# EAGLE board EMC03-Motion Control - PACKD2GILLS (EAGLE 7.4.0)
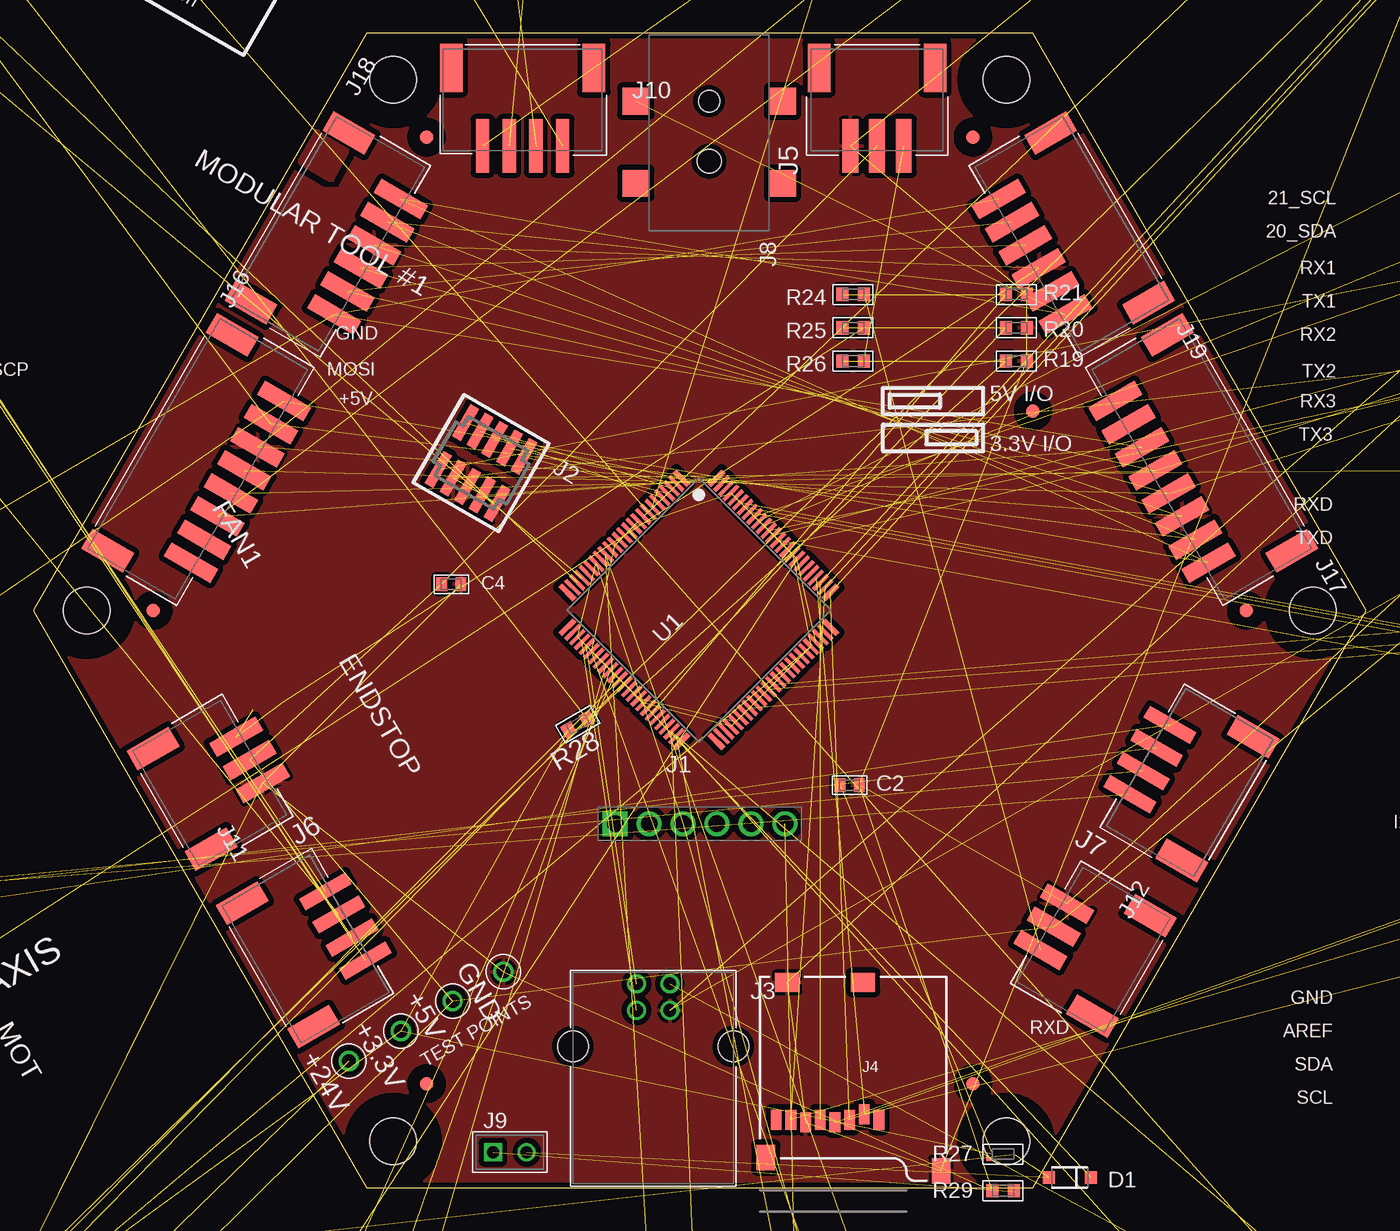
[diagram p0: board, top side]
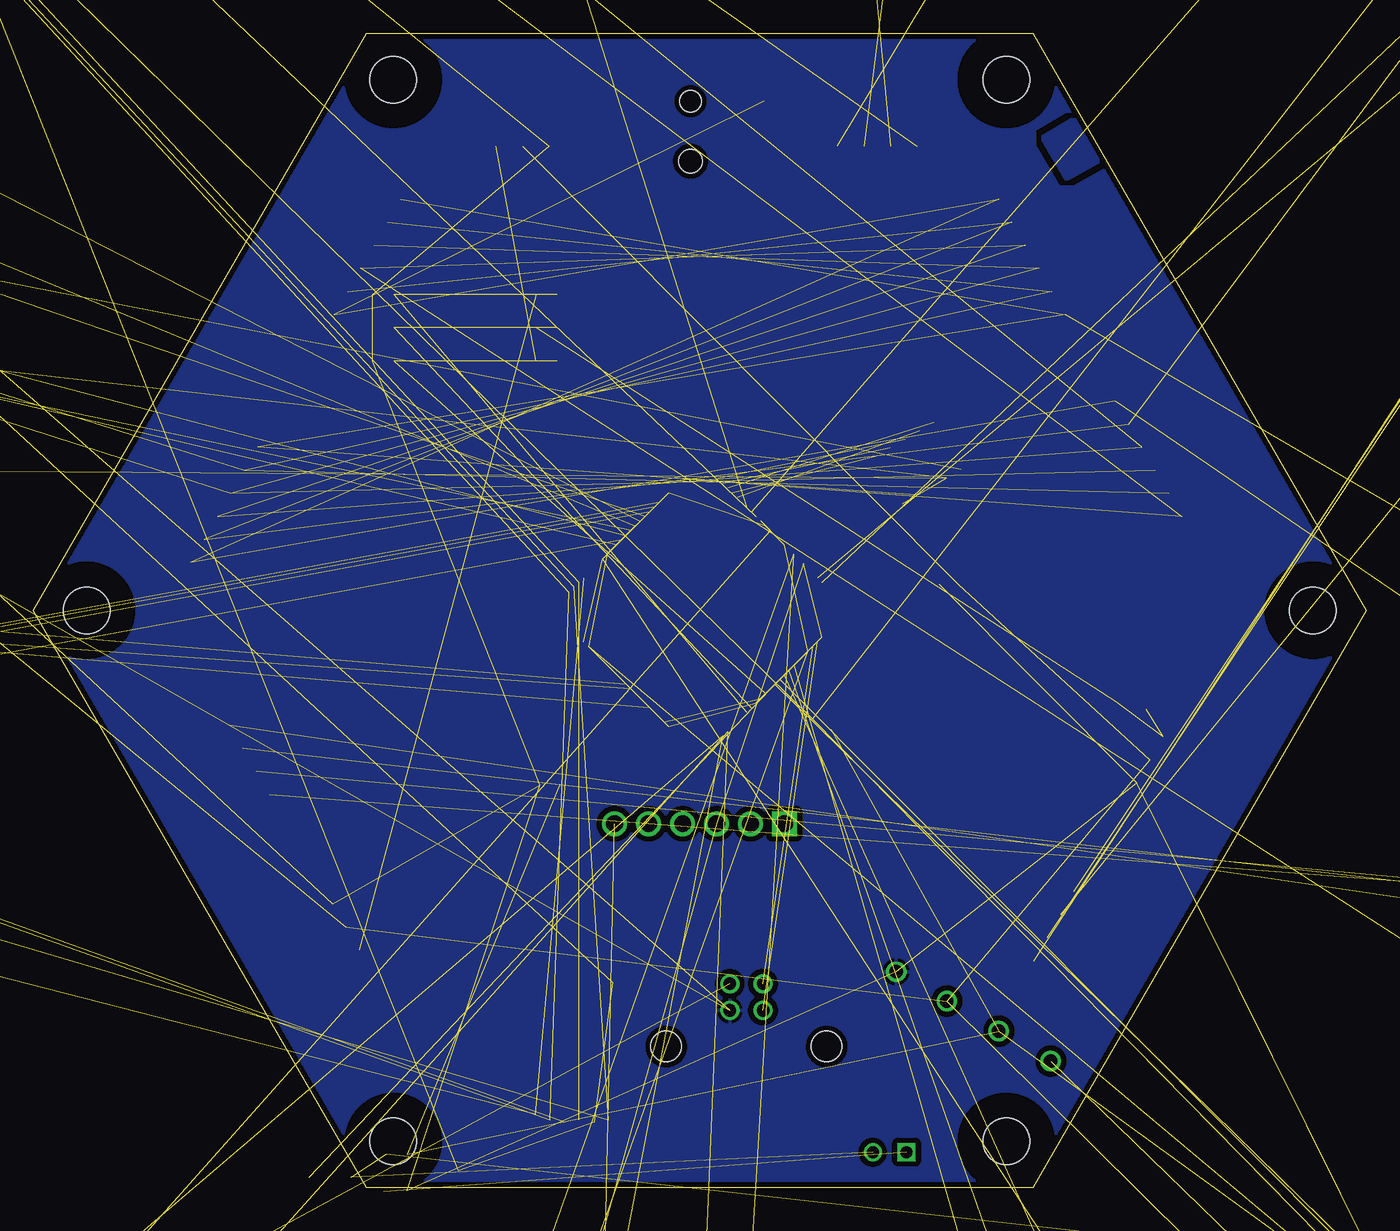
[diagram p1: board, bottom side, seen from below]

Size 100 x 86.6 mm. Coordinates in mm from the lower left corner, seen from the top.
Outline: 25,0 75,0 100,43.3 75,86.6 25,86.6 0,43.3 25,0
Copper layers (1*2*15*16): Top 0.035mm / dielectric 0.2mm / Route2 0.0175mm / dielectric 0.3mm / Route15 0.0175mm / dielectric 0.2mm / Bottom 0.035mm
Design rules "HQPCB_4layer_DRU_no_angle": minimum track width 6mil, minimum drill 12mil, track to track 8mil, track to pad 8mil, pad to pad 6mil, via to via 8mil, smd to smd 0mil, copper to edge 10mil, drill to drill 8mil, minimum pad ring 6mil, minimum via ring 4mil, stop-mask expansion 2mil, vias tented up to drill 100mil, thermal gap 10mil
Net classes: 0 default: width 0.152 mm, drill 0.305 mm, clearance 0.152 mm
Holes 3.5 mm at 4,43.3 27,3.46 73,3.46 96,43.3 27,83.14 73,83.14
tRestrict: area 92.8,40 to 99.2,46.5; area 0.8,40 to 7.2,46.5; area 69.8,0.2 to 76.2,6.7; area 23.8,79.9 to 30.2,86.4; area 69.8,79.9 to 76.2,86.4; area 23.8,0.2 to 30.2,6.7
bRestrict: area 0.8,40 to 7.2,46.5; area 69.8,79.9 to 76.2,86.4; area 92.8,40 to 99.2,46.5; area 23.8,0.2 to 30.2,6.7; area 69.8,0.2 to 76.2,6.7; area 23.8,79.9 to 30.2,86.4

## Footprints (pad centres in the part's own frame; a part is rotated, then mirrored left to right if it is on the bottom)
C0603 = smd 0.8 x 1: 1 -0.725,0; 2 0.725,0
PANASONIC_D = smd 3 x 1.4: + 2.4,0; - -2.4,0
C-RAD-6.3MM = drill 0.5 pad 0.75 square: NEG 0,1.25 | drill 0.5 pad 0.75: POS 0,-1.25
C-SMD-4MM = smd 3.4 x 0.9: NEG -2.1,0; POS 2.1,0
C-SMD-10MM = smd 1.32 x 4.225: NEG 0,-4.162; POS 0,4.162
SOD-123 = smd 0.9 x 0.95: A 1.575,0; C -1.575,0
DIO-SM2 = smd 1.85 x 1.8: NEG -2,0; POS 2,0
MICRO-SMP = smd 1.6 x 1.1: NEG -0.9,0 | smd 1.05 x 0.8: POS 1.04,0
F0603 = smd 1.1 x 1: 1 -0.8,0; 2 0.8,0
FIDUCIAL = smd 1 x 1: 1 0,0
CON-HDR-6POS-MALE = drill 1.25 square: 1 -6.35,0 | drill 1.25: 2 -3.8,0; 3 -1.26,0; 4 1.28,0; 5 3.85,0; 6 6.39,0
FTSH-105-01-XXX-DV-K = smd 0.737 x 2.794: 1 -2.54,-2.032; 2 -2.54,2.032; 3 -1.27,-2.032; 4 -1.27,2.032; 5 0,-2.032; 6 0,2.032; 7 1.27,-2.032; 8 1.27,2.032; 9 2.54,-2.032; 10 2.54,2.032
USB-B(THRU) = drill 0.95: 1 1.25,1; 2 -1.25,1; 3 -1.25,-1; 4 1.25,-1 | hole 2.3: -6.02,-3.71; 6.02,-3.71
MICRO-SD-SOCKET-PP = smd 0.8 x 1.5: 1 -8.94,10.7; 2 -7.84,10.3; 3 -6.74,10.7; 4 -5.64,10.9; 5 -4.54,10.7; 6 -3.44,10.9; 7 -2.34,10.7; 8 -1.24,10.7 | smd 1.8 x 1.4: CD1 -7.75,0.4; CD2 -2.05,0.4 | smd 1.4 x 1.9: GND1 -13.6,14.55; GND2 -0.45,13.55
CONN-JST-PH-2.0MM-3P-SMT-RA = smd 1.2 x 4: 1 2,0; 2 0,0; 3 -2,0 | smd 1.7 x 3.6: NC1 -4.35,5.85; NC2 4.35,5.85
PJ-694106106102 = smd 2 x 2: 2 0,-5.5; 3 6.15,-5.5; TAB1 6.15,5.5; TAB2 0,5.5 | hole 1.6: 0,0 | hole 1.8: 4.5,0
CON-HDR-2POS-MALE = drill 0.9 square: 1 -1.27,0 | drill 0.9: 2 1.27,0
CONN-JST-PH-2.0MM-4P-SMT-RA = smd 1 x 4: 1 3,0; 2 1,0; 3 -1,0; 4 -3,0 | smd 1.7 x 3.6: NC1 5.35,5.85; NC2 -5.35,5.85
CONN-JST-PH-2.0MM-5P-SMT-RA = smd 1.2 x 4: 1 4,0; 2 2,0; 3 0,0; 4 -2,0; 5 -4,0 | smd 1.7 x 3.6: NC1 6.35,5.85; NC2 -6.35,5.85
CONN-JST-PH-2.0MM-8P-SMT-RA = smd 1.2 x 4: 1 7,0; 2 5,0; 3 3,0; 4 1,0; 5 -1,0; 6 -3,0; 7 -5,0; 8 -7,0 | smd 1.7 x 3.6: NC1 9.35,5.85; NC2 -9.35,5.85
CONN-JST-PH-2.0MM-6P-SMT-RA = smd 1.2 x 4: 1 5,0; 2 3,0; 3 1,0; 4 -1,0; 5 -3,0; 6 -5,0 | smd 1.7 x 3.6: NC1 7.35,5.85; NC2 -7.35,5.85
L-SMD-12.5MM = smd 3.95 x 5.5: P$1 -5.1,0; P$2 5.1,0
LED0603 = smd 1.1 x 1: A -0.85,0; C 0.85,0
HC-49/U-S = smd 5.5 x 1.5: 1 -4.25,0; 2 4.25,0
R1206 = smd 1.2 x 1.8: 1 -1.2,0; 2 1.2,0
R0603 = smd 0.9 x 1: 1 -0.8,0; 2 0.8,0
MAGJACK(HR911105A) = drill 1.15: 1 4.44,-6.35; 2 3.18,-8.89; 3 1.9,-6.35; 4 0.64,-8.89; 5 -0.64,-6.35; 6 -1.9,-8.89; 7 -3.18,-6.35; 8 -4.44,-8.89 | drill 1.27: 9 6.625,4.9; 10 4.085,4.9; 11 -4.085,4.9; 12 -6.625,4.9 | drill 3.5: SHLD0 5.715,0; SHLD1 -5.715,0 | hole 1.7: -7.745,-3.05; 7.745,-3.05
SMS-001 = smd 1.092 x 2.007: 1 0,-4.496; 2 0,4.496
0603 = smd 1.1 x 1: 1 -0.85,0; 2 0.85,0
CON-TESTPOINT = drill 1.016: 1 0,0
LQFP-100 = smd 0.4 x 1.5: 1 -6.05,-7.9; 25 6.05,-7.9; 51 6.05,7.9; 75 -6.05,7.9 | smd 0.28 x 1.5: 2 -5.5,-7.9; 3 -5,-7.9; 4 -4.5,-7.9; 5 -4,-7.9; 6 -3.5,-7.9; 7 -3,-7.9; 8 -2.5,-7.9; 9 -2,-7.9; 10 -1.5,-7.9; 11 -1,-7.9; 12 -0.5,-7.9; 13 0,-7.9; 14 0.5,-7.9; 15 1,-7.9; 16 1.5,-7.9; 17 2,-7.9; 18 2.5,-7.9; 19 3,-7.9; 20 3.5,-7.9; 21 4,-7.9; 22 4.5,-7.9; 23 5,-7.9; 24 5.5,-7.9; 52 5.5,7.9; 53 5,7.9; 54 4.5,7.9; 55 4,7.9; 56 3.5,7.9; 57 3,7.9; 58 2.5,7.9; 59 2,7.9; 60 1.5,7.9; 61 1,7.9; 62 0.5,7.9; 63 0,7.9; 64 -0.5,7.9; 65 -1,7.9; 66 -1.5,7.9; 67 -2,7.9; 68 -2.5,7.9; 69 -3,7.9; 70 -3.5,7.9; 71 -4,7.9; 72 -4.5,7.9; 73 -5,7.9; 74 -5.5,7.9 | smd 1.5 x 0.4: 26 7.9,-6.05; 50 7.9,6.05; 76 -7.9,6.05; 100 -7.9,-6.05 | smd 1.5 x 0.28: 27 7.9,-5.5; 28 7.9,-5; 29 7.9,-4.5; 30 7.9,-4; 31 7.9,-3.5; 32 7.9,-3; 33 7.9,-2.5; 34 7.9,-2; 35 7.9,-1.5; 36 7.9,-1; 37 7.9,-0.5; 38 7.9,0; 39 7.9,0.5; 40 7.9,1; 41 7.9,1.5; 42 7.9,2; 43 7.9,2.5; 44 7.9,3; 45 7.9,3.5; 46 7.9,4; 47 7.9,4.5; 48 7.9,5; 49 7.9,5.5; 77 -7.9,5.5; 78 -7.9,5; 79 -7.9,4.5; 80 -7.9,4; 81 -7.9,3.5; 82 -7.9,3; 83 -7.9,2.5; 84 -7.9,2; 85 -7.9,1.5; 86 -7.9,1; 87 -7.9,0.5; 88 -7.9,0; 89 -7.9,-0.5; 90 -7.9,-1; 91 -7.9,-1.5; 92 -7.9,-2; 93 -7.9,-2.5; 94 -7.9,-3; 95 -7.9,-3.5; 96 -7.9,-4; 97 -7.9,-4.5; 98 -7.9,-5; 99 -7.9,-5.5
SOICN-8 = smd 2.2 x 0.6: 1 -2.6,1.905; 2 -2.6,0.635; 3 -2.6,-0.635; 4 -2.6,-1.905; 5 2.6,-1.905; 6 2.6,-0.635; 7 2.6,0.635; 8 2.6,1.905
QFN-24 = smd 0.7 x 0.28: 1 -1.89,1.25; 2 -1.89,0.75; 3 -1.89,0.25; 4 -1.89,-0.25; 5 -1.89,-0.75; 6 -1.89,-1.25; 13 1.89,-1.25; 14 1.89,-0.75; 15 1.89,-0.25; 16 1.89,0.25; 17 1.89,0.75; 18 1.89,1.25 | smd 0.28 x 0.7: 7 -1.25,-1.89; 8 -0.75,-1.89; 9 -0.25,-1.89; 10 0.25,-1.89; 11 0.75,-1.89; 12 1.25,-1.89; 19 1.25,1.89; 20 0.75,1.89; 21 0.25,1.89; 22 -0.25,1.89; 23 -0.75,1.89; 24 -1.25,1.89 | smd 2.5 x 2.5: PAD 0,0
SOT-25 = smd 0.38 x 0.4: 1 0.95,1.2; 2 0,1.2; 3 -0.95,1.2; 4 -0.95,-1.2; 5 0.95,-1.2
SC70 = smd 0.4 x 0.9: 1 0.65,1.1; 2 0,1.1; 3 -0.65,1.1; 4 -0.65,-1.1; 5 0.65,-1.1
QFN36-(5X6) = smd 0.45 x 0.3: 1 -2.3,2.25; 2 -2.3,1.75; 3 -2.3,1.25; 4 -2.3,0.75; 5 -2.3,0.25; 6 -2.3,-0.25; 7 -2.3,-0.75; 8 -2.3,-1.25; 9 -2.3,-1.75; 10 -2.3,-2.25; 19 2.3,-2.25; 20 2.3,-1.75; 21 2.3,-1.25; 22 2.3,-0.75; 23 2.3,-0.25; 24 2.3,0.25; 25 2.3,0.75; 26 2.3,1.25; 27 2.3,1.75; 28 2.3,2.25 | smd 0.3 x 0.45: 11 -1.75,-2.8; 12 -1.25,-2.8; 13 -0.75,-2.8; 14 -0.25,-2.8; 15 0.25,-2.8; 16 0.75,-2.8; 17 1.25,-2.8; 18 1.75,-2.8; 29 1.75,2.8; 30 1.25,2.8; 31 0.75,2.8; 32 0.25,2.8; 33 -0.25,2.8; 34 -0.75,2.8; 35 -1.25,2.8; 36 -1.75,2.8 | smd 2.6 x 3.1: PAD 0,0
SOT-23-5 = smd 0.7 x 1: 1 0.95,1.2; 2 0,1.2; 3 -0.95,1.2; 4 -0.95,-1.2; 5 0.95,-1.2
TO263-5 = smd 1.07 x 2.25: 1 -3.4,-8.13; 2 -1.7,-8.13; 3 0,-8.13; 4 1.7,-8.13; 5 3.4,-8.13 | smd 10.8 x 6.99: GND 0,3.495
SOT-89 = smd 1 x 2.1: 1 -1.5,-2; 2 0,-2; 3 1.5,-2

## Placement (x,y rotation side)
C1  12pF  [C0603]  -519.62,512.92 0 top  (outside the outline)
C2  0.1uF  [C0603]  61.24,30.19 0 top
C3  100uF  [PANASONIC_D]  114.25,52.89 270 top  (outside the outline)
C4  0.1uF  [C0603]  31.35,45.27 0 top
C5  0.1uF  [C0603]  129.9,-266.51 0 top  (outside the outline)
C6  10nF  [C0603]  129.9,-331.46 0 top  (outside the outline)
C7  0.1uF  [C0603]  194.86,-266.51 0 top  (outside the outline)
C8  10nF  [C0603]  194.86,-331.46 0 top  (outside the outline)
C9  0.1uF  [C0603]  259.81,-266.51 0 top  (outside the outline)
C10  10nF  [C0603]  259.81,-331.46 0 top  (outside the outline)
C11  12pF  [C0603]  584.57,-6.7 0 top  (outside the outline)
C12  12pF  [C0603]  649.52,-6.7 0 top  (outside the outline)
C13  0.1uF  [C0603]  584.57,58.25 0 top  (outside the outline)
C14  10uF  [C-RAD-6.3MM]  584.57,318.06 0 top  (outside the outline)
C15  100 nF  [C0603]  -129.9,-6.7 0 top  (outside the outline)
C16  470 nF  [C0603]  -389.71,58.25 0 top  (outside the outline)
C17  100 nF  [C0603]  -324.76,58.25 0 top  (outside the outline)
C18  0.1uF  [C0603]  649.52,58.25 0 top  (outside the outline)
C19  0.1uF  [C0603]  714.47,58.25 0 top  (outside the outline)
C20  1uF  [C-SMD-4MM]  389.71,58.25 0 top  (outside the outline)
C21  470pF  [C0603]  519.62,58.25 0 top  (outside the outline)
C22  10uF  [C-RAD-6.3MM]  649.52,318.06 0 top  (outside the outline)
C23  0.1uF  [C0603]  324.76,-6.7 0 top  (outside the outline)
C24  0.1uF  [C0603]  389.71,-6.7 0 top  (outside the outline)
C25  0.1uF  [C0603]  454.66,-6.7 0 top  (outside the outline)
C26  18pF  [C0603]  714.47,-6.7 0 top  (outside the outline)
C27  10nF  [C0603]  324.76,-331.46 0 top  (outside the outline)
C28  0.1uF  [C0603]  324.76,-266.51 0 top  (outside the outline)
C29  0.1uF  [C0603]  64.95,-331.46 0 top  (outside the outline)
C30  18pF  [C0603]  324.76,-71.65 0 top  (outside the outline)
C31  18pF  [C0603]  389.71,-71.65 0 top  (outside the outline)
C32  18pF  [C0603]  454.66,-71.65 0 top  (outside the outline)
C33  1uF  [C0603]  519.62,-71.65 0 top  (outside the outline)
C34  0.1uF  [C0603]  519.62,-6.7 0 top  (outside the outline)
C35  1uF  [C0603]  584.57,-71.65 0 top  (outside the outline)
C36  1uF  [C0603]  649.52,-71.65 0 top  (outside the outline)
C37  220uF  [C-SMD-10MM]  -64.95,-136.6 0 top  (outside the outline)
C38  470uF  [C-SMD-10MM]  -194.86,-266.51 0 top  (outside the outline)
C39  100 nF  [C0603]  194.86,253.11 0 top  (outside the outline)
C40  470 nF  [C0603]  -64.95,318.06 0 top  (outside the outline)
C41  100 nF  [C0603]  0,318.06 0 top  (outside the outline)
C42  100 nF  [C0603]  64.95,318.06 0 top  (outside the outline)
C43  470pF  [C0603]  -64.95,383.01 0 top  (outside the outline)
C44  470pF  [C0603]  0,383.01 0 top  (outside the outline)
C45  470pF  [C0603]  64.95,383.01 0 top  (outside the outline)
C46  470pF  [C0603]  129.9,383.01 0 top  (outside the outline)
C47  100nF  [C0603]  194.86,383.01 0 top  (outside the outline)
C48  100nF  [C0603]  -64.95,447.96 0 top  (outside the outline)
C49  22 nF  [C0603]  0,447.96 0 top  (outside the outline)
C50  0.33uF  [C0603]  194.86,318.06 0 top  (outside the outline)
C51  100 nF  [C0603]  129.9,318.06 0 top  (outside the outline)
C52  100 nF  [C0603]  -259.81,58.25 0 top  (outside the outline)
C53  470pF  [C0603]  -389.71,123.2 0 top  (outside the outline)
C54  470pF  [C0603]  -324.76,123.2 0 top  (outside the outline)
C55  470pF  [C0603]  -259.81,123.2 0 top  (outside the outline)
C56  470pF  [C0603]  -194.86,123.2 0 top  (outside the outline)
C57  100nF  [C0603]  -129.9,123.2 0 top  (outside the outline)
C58  100nF  [C0603]  -389.71,188.16 0 top  (outside the outline)
C59  22 nF  [C0603]  -324.76,188.16 0 top  (outside the outline)
C60  0.33uF  [C0603]  -129.9,58.25 0 top  (outside the outline)
C61  100 nF  [C0603]  -194.86,58.25 0 top  (outside the outline)
C62  100 nF  [C0603]  -129.9,318.06 0 top  (outside the outline)
C63  470 nF  [C0603]  -389.71,383.01 0 top  (outside the outline)
C64  100 nF  [C0603]  -324.76,383.01 0 top  (outside the outline)
C65  100 nF  [C0603]  -259.81,383.01 0 top  (outside the outline)
C66  470pF  [C0603]  -389.71,447.96 0 top  (outside the outline)
C67  470pF  [C0603]  -324.76,447.96 0 top  (outside the outline)
C68  470pF  [C0603]  -259.81,447.96 0 top  (outside the outline)
C69  470pF  [C0603]  -194.86,447.96 0 top  (outside the outline)
C70  100nF  [C0603]  -129.9,447.96 0 top  (outside the outline)
C71  100nF  [C0603]  -389.71,512.92 0 top  (outside the outline)
C72  22 nF  [C0603]  -324.76,512.92 0 top  (outside the outline)
C73  0.33uF  [C0603]  -129.9,383.01 0 top  (outside the outline)
C74  100 nF  [C0603]  -194.86,383.01 0 top  (outside the outline)
C75  12pF  [C0603]  -454.66,512.92 0 top  (outside the outline)
C76  0.47uF  [C0603]  -714.47,512.92 0 top  (outside the outline)
D1  1N4148  [SOD-123]  77.75,0.75 180 top
D2  SJPB-H6  [DIO-SM2]  -194.86,-201.56 0 top  (outside the outline)
D3  MSS1P6  [MICRO-SMP]  -64.95,253.11 0 top  (outside the outline)
D4  MSS1P6  [MICRO-SMP]  0,253.11 0 top  (outside the outline)
D5  MSS1P6  [MICRO-SMP]  64.95,253.11 0 top  (outside the outline)
D6  MSS1P6  [MICRO-SMP]  129.9,253.11 0 top  (outside the outline)
D7  MSS1P6  [MICRO-SMP]  -389.71,-6.7 0 top  (outside the outline)
D8  MSS1P6  [MICRO-SMP]  -324.76,-6.7 0 top  (outside the outline)
D9  MSS1P6  [MICRO-SMP]  -259.81,-6.7 0 top  (outside the outline)
D10  MSS1P6  [MICRO-SMP]  -194.86,-6.7 0 top  (outside the outline)
D11  MSS1P6  [MICRO-SMP]  -389.71,318.06 0 top  (outside the outline)
D12  MSS1P6  [MICRO-SMP]  -324.76,318.06 0 top  (outside the outline)
D13  MSS1P6  [MICRO-SMP]  -259.81,318.06 0 top  (outside the outline)
D14  MSS1P6  [MICRO-SMP]  -194.86,318.06 0 top  (outside the outline)
FB1  BLM18AG121SN1D  [F0603]  454.66,-136.6 0 top  (outside the outline)
FB2  BLM18AG121SN1D  [F0603]  324.76,-461.36 0 top  (outside the outline)
FID1  FIDUCIAL  [FIDUCIAL]  9,43.3 0 top
FID2  FIDUCIAL  [FIDUCIAL]  91,43.3 0 top
FID3  FIDUCIAL  [FIDUCIAL]  29.5,78.81 0 top
FID4  FIDUCIAL  [FIDUCIAL]  29.5,7.79 0 top
FID5  FIDUCIAL  [FIDUCIAL]  70.5,7.79 0 top
FID6  FIDUCIAL  [FIDUCIAL]  75,58.25 0 top
FID7  FIDUCIAL  [FIDUCIAL]  70.5,78.81 0 top
J1  UART0  [CON-HDR-6POS-MALE]  50,27.3 0 top
J2  FTSH-105-1-L-DV  [FTSH-105-01-XXX-DV-K]  33.6,54.36 330 top
J3  USB-B  [USB-B(THRU)]  46.5,14.3 0 top
J4  MicroSD  [MICRO-SD-SOCKET-PP]  54.5,15.8 180 top
J5  S3B-PH-SM4  [CONN-JST-PH-2.0MM-3P-SMT-RA]  63.3,78.15 0 top
J6  S3B-PH-SM4  [CONN-JST-PH-2.0MM-3P-SMT-RA]  16.22,32.08 120 top
J7  S3B-PH-SM4  [CONN-JST-PH-2.0MM-3P-SMT-RA]  76.56,19.56 240 top
J8  694106106102  [PJ-694106106102]  50.7,81.5 270 top
J9  S2B-PH-SM4  [CON-HDR-2POS-MALE]  35.75,2.65 0 top
J10  S4B-PH-SM4  [CONN-JST-PH-2.0MM-4P-SMT-RA]  36.7,78.15 0 top
J11  S4B-PH-SM4  [CONN-JST-PH-2.0MM-4P-SMT-RA]  23.41,19.62 120 top
J12  S4B-PH-SM4  [CONN-JST-PH-2.0MM-4P-SMT-RA]  83.78,32.11 240 top
J13  S5B-PH-SM4  [CONN-JST-PH-2.0MM-5P-SMT-RA]  27.1,101.6 0 top  (outside the outline)
J14  S5B-PH-SM4  [CONN-JST-PH-2.0MM-5P-SMT-RA]  51,100.6 0 top  (outside the outline)
J15  S5B-PH-SM4  [CONN-JST-PH-2.0MM-5P-SMT-RA]  70.7,96.4 0 top  (outside the outline)
J16  S8B-PH-SM4  [CONN-JST-PH-2.0MM-8P-SMT-RA]  15.32,52.95 60 top
J17  S8B-PH-SM4  [CONN-JST-PH-2.0MM-8P-SMT-RA]  84.68,52.95 300 top
J18  S6B-PH-SM4  [CONN-JST-PH-2.0MM-6P-SMT-RA]  25.07,69.83 60 top
J19  S6B-PH-SM4  [CONN-JST-PH-2.0MM-6P-SMT-RA]  74.93,69.83 300 top
L1  100uH  [L-SMD-12.5MM]  -194.86,-136.6 0 top  (outside the outline)
LED1  GREEN  [LED0603]  194.86,-396.41 0 top  (outside the outline)
LED2  GREEN  [LED0603]  259.81,-396.41 0 top  (outside the outline)
LED3  GREEN  [LED0603]  324.76,-396.41 0 top  (outside the outline)
LED4  GREEN  [LED0603]  64.95,-461.36 0 top  (outside the outline)
LED5  RED  [LED0603]  194.86,-461.36 0 top  (outside the outline)
LED6  RED  [LED0603]  -324.76,-71.65 0 top  (outside the outline)
LED7  RED  [LED0603]  -194.86,-331.46 0 top  (outside the outline)
LOGO1  LOGO-FIREPICKLARGE  [LOGO-FIREPICK]  120.12,-7.06 0 bottom  (outside the outline)
LOGO2  LOGO-OSHWMEDIUM  [LOGO-OSHW-MEDIUM]  127.25,55.5 0 bottom  (outside the outline)
LOGO3  LOGO-CC-BY-SALARGE  [LOGO-CC-BY-SA]  129.25,84.75 330 bottom  (outside the outline)
LOGO4  LOGO-FIREPICKLARGE  [LOGO-FIREPICK]  -24.76,44.19 0 top  (outside the outline)
LOGO5  LOGO-OSHWMEDIUM  [LOGO-OSHW-MEDIUM]  129.9,58.65 0 top  (outside the outline)
LOGO6  LOGO-CC-BY-SALARGE  [LOGO-CC-BY-SA]  114.55,75.68 30 top  (outside the outline)
LOGO7  LOGO-CC-BY-SALARGE  [LOGO-CC-BY-SA]  64.95,-71.65 0 top  (outside the outline)
LOGO8  LOGO-CC-BY-SALARGE  [LOGO-CC-BY-SA]  64.95,-136.6 0 top  (outside the outline)
LOGO9  LOGO-CC-BY-SALARGE  [LOGO-CC-BY-SA]  -324.76,-266.51 0 top  (outside the outline)
LOGO10  LOGO-FIREPICKLARGE  [LOGO-FIREPICK]  -519.62,253.11 0 top  (outside the outline)
LOGO11  LOGO-FIREPICKLARGE  [LOGO-FIREPICK]  -519.62,318.06 0 top  (outside the outline)
LOGO12  LOGO-FIREPICKLARGE  [LOGO-FIREPICK]  -519.62,383.01 0 top  (outside the outline)
Q1  12MHz  [HC-49/U-S]  -454.66,447.96 0 top  (outside the outline)
Q2  25MHz  [HC-49/U-S]  454.66,58.25 0 top  (outside the outline)
R1  0.22  [R1206]  -259.81,188.16 0 top  (outside the outline)
R2  0.22  [R1206]  -194.86,188.16 0 top  (outside the outline)
R3  1M  [R0603]  -519.62,447.96 0 top  (outside the outline)
R4  10k  [R0603]  259.81,-201.56 0 top  (outside the outline)
R5  10k  [R0603]  324.76,-201.56 0 top  (outside the outline)
R6  470R  [R0603]  -324.76,-331.46 0 top  (outside the outline)
R7  470R  [R0603]  -64.95,-201.56 0 top  (outside the outline)
R8  470R  [R0603]  -64.95,-266.51 0 top  (outside the outline)
R9  470R  [R0603]  -64.95,-331.46 0 top  (outside the outline)
R10  22R  [R0603]  324.76,188.16 0 top  (outside the outline)
R11  22R  [R0603]  389.71,188.16 0 top  (outside the outline)
R12  22R  [R0603]  454.66,188.16 0 top  (outside the outline)
R13  1M  [R0603]  519.62,188.16 0 top  (outside the outline)
R14  12.1K  [R0603]  714.47,318.06 0 top  (outside the outline)
R15  22R  [R0603]  584.57,188.16 0 top  (outside the outline)
R16  1.5K  [R0603]  649.52,188.16 0 top  (outside the outline)
R17  10K  [R0603]  714.47,188.16 0 top  (outside the outline)
R18  10k  [R0603]  194.86,-201.56 0 top  (outside the outline)
R19  20K  [R0603]  73.75,62 180 top
R20  20K  [R0603]  73.75,64.5 180 top
R21  20K  [R0603]  73.75,67 180 top
R22  49R9  [R0603]  324.76,253.11 0 top  (outside the outline)
R23  10K  [R0603]  324.76,123.2 0 top  (outside the outline)
R24  10K  [R0603]  61.5,67 0 top
R25  10K  [R0603]  61.5,64.5 0 top
R26  10K  [R0603]  61.5,62 0 top
R27  100K  [R0603]  72.75,2.5 180 top
R28  10K  [R0603]  40.85,34.76 210 top
R29  4.7K  [R0603]  72.75,-0.25 0 top
R30  49R9  [R0603]  389.71,253.11 0 top  (outside the outline)
R31  49R9  [R0603]  454.66,253.11 0 top  (outside the outline)
R32  49R9  [R0603]  519.62,253.11 0 top  (outside the outline)
R33  330R  [R0603]  584.57,253.11 0 top  (outside the outline)
R34  330R  [R0603]  649.52,253.11 0 top  (outside the outline)
R35  10K  [R0603]  389.71,123.2 0 top  (outside the outline)
R36  10k  [R0603]  454.66,123.2 0 top  (outside the outline)
R37  10K  [R0603]  519.62,123.2 0 top  (outside the outline)
R38  1K  [R0603]  584.57,123.2 0 top  (outside the outline)
R39  1K  [R0603]  649.52,123.2 0 top  (outside the outline)
R40  100R  [R0603]  714.47,253.11 0 top  (outside the outline)
R41  470R  [R0603]  -64.95,-6.7 0 top  (outside the outline)
R42  1.2K  [R0603]  -324.76,-136.6 0 top  (outside the outline)
R43  10K  [R0603]  -324.76,-201.56 0 top  (outside the outline)
R44  0.22  [R1206]  64.95,447.96 0 top  (outside the outline)
R45  0.22  [R1206]  129.9,447.96 0 top  (outside the outline)
R46  0.22  [R1206]  -194.86,512.92 0 top  (outside the outline)
R47  0.22  [R1206]  -259.81,512.92 0 top  (outside the outline)
RJ1  HR911105A  [MAGJACK(HR911105A)]  389.71,318.06 0 top  (outside the outline)
S1  SWS001  [SMS-001]  129.9,-201.56 0 top  (outside the outline)
S2  147873-2  [0603]  64.95,-396.41 0 top  (outside the outline)
S3  147873-2  [0603]  129.9,-396.41 0 top  (outside the outline)
TP1  +3.3V  [CON-TESTPOINT]  27.56,11.74 30 top
TP2  +5V  [CON-TESTPOINT]  31.46,13.99 30 top
TP3  +24V  [CON-TESTPOINT]  23.67,9.49 30 top
TP4  GND  [CON-TESTPOINT]  35.27,16.19 30 top
U1  LPC1768  [LQFP-100]  49.94,43.35 225 top
U2  SP3485  [SOICN-8]  324.76,58.25 0 top  (outside the outline)
U3  LAN8720A  [QFN-24]  714.47,-71.65 0 top  (outside the outline)
U4  74LVC1G04W5-7  [SOT-25]  389.71,-136.6 0 top  (outside the outline)
U5  74AHCT  [SC70]  0,-6.7 0 top  (outside the outline)
U6  TMC2130-LA  [QFN36-(5X6)]  194.86,188.16 0 top  (outside the outline)
U7  TMC2130-LA  [QFN36-(5X6)]  -129.9,253.11 0 top  (outside the outline)
U8  TMC2130-LA  [QFN36-(5X6)]  194.86,512.92 0 top  (outside the outline)
U$25  TIN-WHISKERSTSTOP  [TIN-WHISKERS-TSTOP]  31.69,-20.74 0 top  (outside the outline)
VR1  TC1015-3.3VCT713  [SOT-23-5]  324.76,-136.6 0 top  (outside the outline)
VR2  SI-8050JD  [TO263-5]  -64.95,-71.65 0 top  (outside the outline)
VR3  KA78L05AMTF  [SOT-89]  -584.57,-396.41 0 top  (outside the outline)
VR4  KA78L05AMTF  [SOT-89]  -714.47,-396.41 0 top  (outside the outline)
VR5  KA78L05AMTF  [SOT-89]  -649.52,-396.41 0 top  (outside the outline)

## Library data of the parts
C1 C11 C12 C75 = TinWhiskers; PARTNO: GRM1885C1H120FA01J
C2 C4 C15 C17 C39 C41 C42 C47 C48 C51 C52 C57 C58 C61 C62 C64 C65 C70 C71 C74 = TinWhiskers; PARTNO: UMK107B7104KA-T
C3 = rcl; PARTNO: EMVA500ADA101MHA0G
C5 C7 C9 C13 C18 C19 C23-C25 C28 C29 C34 = TinWhiskers; PARTNO: GMK107BJ104KAHT
C6 C8 C10 C27 = TinWhiskers; PARTNO: GRM188R71H103KA01D
C14 C22 = TinWhiskers; PARTNO: EMVH350ADA100MF60G
C16 C40 C63 = TinWhiskers; PARTNO: UMK107B7474KA-TR
C20 = TinWhiskers; PARTNO: EMVE500ADA1R0MD55G
C21 C43-C46 C53-C56 C66-C69 = TinWhiskers; PARTNO: GRM188R72A471KA01D
C26 C30-C32 = TinWhiskers; PARTNO: GCM1885C1H180JA16D
C33 C35 C36 = TinWhiskers; PARTNO: UMK107AB7105KA-T
C37 = TinWhiskers; PARTNO: EMVY500ADA221MJA0G
C38 = TinWhiskers; PARTNO: EMVA250ADA471MJA0G
C49 C59 C72 = TinWhiskers; PARTNO: GRM188R71H223KA01D
C50 C60 C73 = TinWhiskers; PARTNO: C1608X7R1V334M080AB
C76 = TinWhiskers; PARTNO: LMK107B7474KA-T
D1 = SparkFun-DiscreteSemi; PARTNO: 1N4148W-7-F
D2 = TinWhiskers; PARTNO: SJPB-H6
D3-D14 = TinWhiskers; PARTNO: MSS1P6
FB1 FB2 = TinWhiskers; PARTNO: BLM18AG121SN1D
FID1-FID7 LOGO1 LOGO2 LOGO4 LOGO5 LOGO10-LOGO12 = FirePick; BOM: EXCLUDE
J1 = TinWhiskers; PARTNO: 67996-206HLF
J2 = TinWhiskers; PARTNO: FTSH-105-01-L-DV
J3 = TinWhiskers; PARTNO: 61729-1011BLF
J4 = TinWhiskers; PARTNO: 47334-0001
J5-J7 = TinWhiskers; PARTNO: S3B-PH-SM4-TB(LF)(SN)
J8 = TinWhiskers; PARTNO: 694106106102
J9 = TinWhiskers; PARTNO: S2B-PH-SM4-TB(LF)(SN)
J10-J12 = TinWhiskers; PARTNO: S4B-PH-SM4-TB(LF)(SN)
J13-J15 = TinWhiskers; PARTNO: S5B-PH-SM4-TB(LF)(SN)
J16 J17 = TinWhiskers; PARTNO: S8B-PH-SM4-TB(LF)(SN)
J18 J19 = TinWhiskers; PARTNO: S6B-PH-SM4-TB(LF)(SN)
L1 = TinWhiskers; PARTNO: DR125-101-R
LED1-LED4 = TinWhiskers; PARTNO: SML-D12M8WT86
LED5-LED7 = TinWhiskers; PARTNO: SML-D12U8WT86
LOGO3 LOGO6-LOGO9 = FirePick; BOM: EXCLUDE; DNP: T
Q1 = TinWhiskers; PARTNO: HCM4912000000ABJT
Q2 = TinWhiskers; PARTNO: HCM4925000000MABJ
R1 R2 R44-R47 = TinWhiskers; PARTNO: RL1206FR-7W0R22L
R3 R13 = TinWhiskers; PARTNO: RC0603FR-071ML
R4 R5 R17 R18 R23-R26 R28 R35-R37 R43 = TinWhiskers; PARTNO: RC0603FR-0710KL
R6-R9 R41 = TinWhiskers; PARTNO: RC0603FR-07470RL
R10-R12 R15 = TinWhiskers; PARTNO: RC0603JR-0722RL
R14 = TinWhiskers; PARTNO: RC0603FR-0712K1L
R16 = TinWhiskers; PARTNO: RC0603FR-071K5L
R19-R21 = TinWhiskers; PARTNO: RC0603FR-0722KL
R22 R30-R32 = TinWhiskers; PARTNO: RC0603FR-0749R9L
R27 = TinWhiskers; PARTNO: RC0603FR-07100KL
R29 = TinWhiskers; PARTNO: RC0603FR-074K7L
R33 R34 = TinWhiskers; PARTNO: RC0603FR-07330RL
R38 R39 = TinWhiskers; PARTNO: RC0603FR-071KL
R40 = TinWhiskers; PARTNO: RC0603FR-07100RL
R42 = TinWhiskers; PARTNO: RC0603FR-071K2L
RJ1 = TinWhiskers; PARTNO: HR911105A
S1 = smd-special; PARTNO: CHS-01TA
S2 S3 = TinWhiskers; PARTNO: 147873-2
TP1-TP4 = FirePick; DNP: T; PARTNO: N/A
U1 = TinWhiskers; PARTNO: LPC1768
U2 = TinWhiskers; PARTNO: SP3485
U3 = TinWhiskers; PARTNO: LAN8720A
U4 = TinWhiskers; PARTNO: 74LVC1G04
U5 = TinWhiskers; PARTNO: CAHCT1G126QDCKRG4
U6-U8 = TinWhiskers; PARTNO: TMC2130-LA
U$25 = !tin-whiskers; PARTNO: N/A
VR1 = TinWhiskers; PARTNO: TC1015-3.3VCT713
VR2 = TinWhiskers; PARTNO: SI-8050JD
VR3-VR5 = TinWhiskers; PARTNO: KA78L05AMTF

## Nets
1A_1: C45.1 D5.NEG J10.3 U6.32
1A_2: C68.1 D13.NEG J11.3 U7.32
1A_3: C55.1 D9.NEG J12.3 U8.32
1B_1: C46.1 D6.NEG J10.4 U6.34
1B_2: C69.1 D14.NEG J11.4 U7.34
1B_3: C56.1 D10.NEG J12.4 U8.34
2A_1: C44.1 D4.NEG J10.2 U6.13
2A_2: C67.1 D12.NEG J11.2 U7.13
2A_3: C54.1 D8.NEG J12.2 U8.13
2B_1: C43.1 D3.NEG J10.1 U6.15
2B_2: C66.1 D11.NEG J11.1 U7.15
2B_3: C53.1 D7.NEG J12.1 U8.15
!ENABLE: J16.2 J17.2 J18.2 J19.2 R28.1 U5.4 U6.22 U7.22 U8.22
!ENABLE_BUF: U1.38 U5.2
+3V3: C2.1 C5.2 C6.2 C7.2 C8.2 C9.2 C10.2 C13.2 C22.POS C23.2 C33.2 C34.2 C36.2 FB1.1 FB2.2 J1.3 J2.1 J4.4 R4.2 R5.2 R16.2 R17.2 R18.2 R27.2 R28.2 R35.1 R36.1 R37.1 R38.2 R41.2 TP1.1 U1.19 U1.28 U1.42 U1.54 U1.71 U1.84 U1.96 U2.8 U3.9 U4.5 U5.5 VR1.5
+5V [power]: C3.+ C4.1 C38.POS J5.2 J6.2 J7.2 J13.1 J14.1 J15.1 J16.6 J17.6 J18.6 J19.6 L1.P$2 R42.2 TP2.1 VR2.4
+24V: C15.2 C16.2 C17.1 C37.POS C39.2 C40.2 C41.1 C42.1 C50.2 C52.1 C60.2 C62.2 C63.2 C64.1 C65.1 C73.2 J8.2 J16.1 J17.1 J18.1 J19.1 R43.2 TP3.1 U6.16 U6.30 U6.31 U7.16 U7.30 U7.31 U8.16 U8.30 U8.31 VR2.1 VR3.1 VR4.1 VR5.1
A: J16.4 J17.4 J18.4 J19.4 R39.2 R40.1 U2.6
B: J16.5 J17.5 J18.5 J19.5 R38.1 R40.2 U2.7
BRA: C48.1 D3.POS D4.POS R44.2 U6.33
BRA2: C71.1 D11.POS D12.POS R46.2 U7.33
BRA3: C58.1 D7.POS D8.POS R1.2 U8.33
BRB: C47.1 D5.POS D6.POS R45.2 U6.14
BRB2: C70.1 D13.POS D14.POS R47.2 U7.14
BRB3: C57.1 D9.POS D10.POS R2.2 U8.14
CLK: U6.1 U7.1 U8.1
CPI: C49.2 U6.28
CPI1: C59.2 U8.28
CPI2: C72.2 U7.28
CPO: C49.1 U6.27
CPO1: C59.1 U8.27
CPO2: C72.1 U7.27
CRSPIN: R12.2 U3.11
DFU: R5.1 S3.2 U1.49
DI: U1.62 U2.4
DPWR: C27.2 C28.2 FB2.1 U1.10 U1.12
DTR: C29.1 J1.6
DTR1: U1.58 U2.2 U2.3
EE_D+: J16.7
EE_D-: J16.8
ENCX_A: J13.2
ENCX_B: J13.3
ENCY_B: J14.3
ENCZ_A: J15.2
ENCZ_B: J15.3
ENXY_A: J14.2
ESTOP: D1.C U1.39
ESTOP_OE: D1.A J9.2 R27.1 U5.1
ETH_CRS_DV: R12.1 U1.92
ETH_MDC: U1.87 U3.13
ETH_MDIO: R16.1 U1.86 U3.12
ETH_REF_CLK: R15.1 U1.88
ETH_RX_ER: R17.1 U1.89 U3.10
ETH_RXD0: R10.1 U1.91
ETH_RXD1: R11.1 U1.90
ETH_TX_EN: U1.93 U3.16
ETH_TXD0: U1.95 U3.17
ETH_TXD1: U1.94 U3.18
GND [power]: C1.1 C2.2 C3.- C4.2 C5.1 C6.1 C7.1 C8.1 C9.1 C10.1 C11.1 C12.1 C13.1 C14.NEG C16.1 C17.2 C18.1 C19.1 C20.NEG C21.1 C22.NEG C23.1 C24.1 C25.1 C26.1 C27.1 C28.1 C30.1 C31.1 C32.1 C33.1 C34.1 C35.1 C36.1 C37.NEG C38.NEG C40.1 C41.2 C42.2 C43.2 C44.2 C45.2 C46.2 C47.2 C48.2 C50.1 C51.1 C52.2 C53.2 C54.2 C55.2 C56.2 C57.2 C58.2 C60.1 C61.1 C63.1 C64.2 C65.2 C66.2 C67.2 C68.2 C69.2 C70.2 C71.2 C73.1 C74.1 C75.1 C76.1 D2.NEG J2.3 J2.5 J2.9 J3.4 J4.6 J4.CD2 J4.GND1 J5.3 J6.3 J7.3 J13.5 J14.5 J15.5 J16.3 J17.3 J18.3 J19.3 LED1.C LED2.C LED3.C LED4.C LED5.C LED6.C LED7.C R1.1 R2.1 R14.1 R19.1 R20.1 R21.1 R23.1 R29.1 R33.2 R34.2 R39.1 R44.1 R45.1 R46.1 R47.1 RJ1.SHLD0 RJ1.SHLD1 S1.1 S2.1 S3.1 TP4.1 U1.11 U1.15 U1.31 U1.41 U1.55 U1.72 U1.83 U1.97 U2.5 U3.PAD U4.3 U5.3 U6.12 U6.18 U6.24 U6.35 U6.36 U6.PAD U7.12 U7.18 U7.24 U7.35 U7.36 U7.PAD U8.12 U8.18 U8.24 U8.35 U8.36 U8.PAD VR2.3 VR2.GND VR3.2 VR4.2 VR5.2
ISP_COM: R4.1 S2.2 U1.48
LED1/REGOFF: RJ1.9 U3.3
LED2/NINTSEL: R23.2 RJ1.12 U3.2
MISO: J4.7 R36.2 U1.77 U6.5 U7.5 U8.5
MOSI: J4.3 R35.2 U1.76 U6.4 U7.4 U8.4
N$3: R15.2 U4.4
N$4: C76.2 VR2.5
N$5: J9.1 R29.2
N$6: C14.POS C18.2 C19.2 C24.2 C25.2 FB1.2 R22.2 R30.2 R31.2 R32.2 RJ1.4 RJ1.5 U3.1 U3.19
N$7: R33.1 RJ1.11
N$8: R34.1 RJ1.10
N$9: LED5.A R41.1
N$10: LED7.A R42.1
N$12: LED6.A R43.1
N$14: D2.POS L1.P$1 VR2.2
N$17: C35.2 VR1.2
N$20: LED1.A R6.1
N$23: C20.POS C21.2 U3.6
N$24: LED2.A R7.1
N$25: LED4.A R9.1
N$26: LED3.A R8.1
NINT/REFCLK0: U3.14 U4.2
NRST: U3.15
RBIAS: R14.2 U3.24
RD+: C31.2 R31.1 RJ1.3 U3.23
RD-: C32.2 R32.1 RJ1.6 U3.22
RESET: C29.2 R18.1 S1.2 U1.17
RESET_N: J2.10 U1.4
RO: U1.63 U2.1
RTCK: J2.7 U1.100
RXD0PIN: R10.2 U3.8
RXD1PIN: R11.2 U3.7
SCK: J4.5 U1.78 U6.3 U7.3 U8.3
SD_CS: J4.2 R37.2 U1.79
SPI_!CS1: U1.9 U6.2
SPI_!CS2: U1.8 U7.2
SPI_!CS3: U1.7 U8.2
STAT_LED4: R6.2 U1.37
STAT_LED5: R7.2 U1.36
STAT_LED6: R8.2 U1.35
STAT_LED7: R9.2 U1.34
SWDCLK: J2.4 U1.5
SWDIO: J2.2 U1.3
SWO: J2.6 U1.1
TD+: C26.2 R22.1 RJ1.1 U3.21
TD-: C30.2 R30.1 RJ1.2 U3.20
TDI: J2.8 U1.2
ULC_D+: J17.7
ULC_D-: J17.8
USB_D+: J3.3 U1.29
USB_D-: J3.2 U1.30
VCC1: C51.2 U6.8 U6.26 VR3.3
VCC2: C74.2 U7.8 U7.26 VR4.3
VCC3: C61.2 U8.8 U8.26 VR5.3
VCP: C39.1 U6.29
VCP1: C15.1 U8.29
VCP2: C62.1 U7.29
VR_IN: J3.1 VR1.1 VR1.3
X_DIR: U6.7
X_INDEX: J13.4
X_MIN: R19.2 R26.1 U1.40
X_STEP: U6.6
X_STOP: J5.1 R26.2
XTAL1: C1.2 Q1.1 R3.1 U1.22
XTAL2: C75.2 Q1.2 R3.2 U1.23
XTAL3: C11.2 Q2.1 R13.1 U3.5
XTAL4: C12.2 Q2.2 R13.2 U3.4
Y_DIR: U7.7
Y_INDEX: J14.4
Y_MIN: R20.2 R25.1 U1.43
Y_STEP: U7.6
Y_STOP: J6.1 R25.2
Z_DIR: U8.7
Z_INDEX: J15.4
Z_MIN: R21.2 R24.1 U1.44
Z_STEP: U8.6
Z_STOP: J7.1 R24.2

## Tracks (layer width: path | path; a pad name or v marks a point on that pad's centre or on a via)
1A_1  (3 unrouted)
1A_2  (3 unrouted)
1A_3  (3 unrouted)
1B_1  (3 unrouted)
1B_2  (3 unrouted)
1B_3  (3 unrouted)
2A_1  (3 unrouted)
2A_2  (3 unrouted)
2A_3  (3 unrouted)
2B_1  (3 unrouted)
2B_2  (3 unrouted)
2B_3  (3 unrouted)
12V
  pour Top (no thermals): 115.55,96.58 119.45,89.88 122.55,91.58 118.65,98.38
  pour Bottom (no thermals): 119.55,96.88 116.35,95.08 118.25,91.98 121.25,93.68
  pour Bottom (no thermals): 128.95,80.58 125.75,78.78 127.65,75.68 130.75,77.48
  pour Bottom (isolate 0.406, no thermals): 19.25,77.48 21.05,80.68 24.25,78.78 22.45,75.68
  pour Bottom (isolate 0.406, no thermals): 28.65,93.68 30.45,96.98 33.65,95.08 31.75,91.98
  pour Top (no thermals): 128.95,80.78 125.75,78.88 127.65,75.78 130.65,77.58
  pour Top (no thermals): 30.75,97.48 28.45,93.68 31.65,91.88 33.85,95.48
  pour Top (no thermals): 21.25,80.88 19.25,77.38 22.35,75.58 24.25,79.08
!ENABLE  (8 unrouted)
!ENABLE_BUF  (1 unrouted)
+3V3  (42 unrouted)
+5V  (16 unrouted)
+24V  (35 unrouted)
A  (6 unrouted)
B  (6 unrouted)
BRA  (4 unrouted)
BRA2  (4 unrouted)
BRA3  (4 unrouted)
BRB  (4 unrouted)
BRB2  (4 unrouted)
BRB3  (4 unrouted)
CLK  (2 unrouted)
CPI  (1 unrouted)
CPI1  (1 unrouted)
CPI2  (1 unrouted)
CPO  (1 unrouted)
CPO1  (1 unrouted)
CPO2  (1 unrouted)
CRSPIN  (1 unrouted)
DFU  (2 unrouted)
DI  (1 unrouted)
DPWR  (4 unrouted)
DTR  (1 unrouted)
DTR1  (2 unrouted)
ESTOP  (1 unrouted)
ESTOP_OE  (3 unrouted)
ETH_CRS_DV  (1 unrouted)
ETH_MDC  (1 unrouted)
ETH_MDIO  (2 unrouted)
ETH_REF_CLK  (1 unrouted)
ETH_RX_ER  (2 unrouted)
ETH_RXD0  (1 unrouted)
ETH_RXD1  (1 unrouted)
ETH_TX_EN  (1 unrouted)
ETH_TXD0  (1 unrouted)
ETH_TXD1  (1 unrouted)
GND  (149 unrouted)
  pour Bottom (isolate 0.406, rank 2): 25,86.6 0,43.3 25,0 75,0 100,43.3 75,86.6
  pour Top (isolate 0.406, rank 2): 25,86.6 0,43.3 25,0 75,0 100,43.3 75,86.6
ISP_COM  (2 unrouted)
LED1/REGOFF  (1 unrouted)
LED2/NINTSEL  (2 unrouted)
MISO  (5 unrouted)
MOSI  (5 unrouted)
N$3  (1 unrouted)
N$4  (1 unrouted)
N$5  (1 unrouted)
  Top 0.3: 73.73,-0.33 R29.2
N$6  (13 unrouted)
N$7  (1 unrouted)
N$8  (1 unrouted)
N$9  (1 unrouted)
N$10  (1 unrouted)
N$12  (1 unrouted)
N$14  (2 unrouted)
N$17  (1 unrouted)
N$20  (1 unrouted)
N$23  (2 unrouted)
N$24  (1 unrouted)
N$25  (1 unrouted)
N$26  (1 unrouted)
NINT/REFCLK0  (1 unrouted)
RBIAS  (1 unrouted)
RD+  (3 unrouted)
RD-  (3 unrouted)
RESET  (3 unrouted)
RESET_N  (1 unrouted)
RO  (1 unrouted)
RTCK  (1 unrouted)
RXD0PIN  (1 unrouted)
RXD1PIN  (1 unrouted)
SCK  (4 unrouted)
SD_CS  (2 unrouted)
SPI_!CS1  (1 unrouted)
SPI_!CS2  (1 unrouted)
SPI_!CS3  (1 unrouted)
STAT_LED4  (1 unrouted)
STAT_LED5  (1 unrouted)
STAT_LED6  (1 unrouted)
STAT_LED7  (1 unrouted)
SWDCLK  (1 unrouted)
SWDIO  (1 unrouted)
SWO  (1 unrouted)
TD+  (3 unrouted)
TD-  (3 unrouted)
TDI  (1 unrouted)
USB_D+  (1 unrouted)
USB_D-  (1 unrouted)
VCC1  (3 unrouted)
VCC2  (3 unrouted)
VCC3  (3 unrouted)
VCP  (1 unrouted)
VCP1  (1 unrouted)
VCP2  (1 unrouted)
VR_IN  (2 unrouted)
X_MIN  (2 unrouted)
  Top 0.3: 60.58,61.98 R26.1
X_STOP  (1 unrouted)
XTAL1  (3 unrouted)
XTAL2  (3 unrouted)
XTAL3  (3 unrouted)
XTAL4  (3 unrouted)
Y_MIN  (2 unrouted)
  Top 0.3: 60.58,64.52 R25.1
Y_STOP  (3 unrouted)
Z_MIN  (2 unrouted)
  Top 0.3: 60.54,67.06 R24.1
Z_STOP  (1 unrouted)

## Text on the board
Top: TOP
Bottom: BOT
tPlace: PS-ON | +12V | STDBY | GND | +5V | MOT | ENDSTOP | MODULAR TOOL #2 | X AXIS | Released under / CC-BY-SA 4.0 license / (http://goo.gl/B0gjwG) / Design by Neil Jansen | SPARE I/O | MODULAR TOOL #3 | MODULAR TOOL #1 | 21_SCL | 20_SDA | JTAG | TCK | RX1 | GND | TX1 | TDO | IOREF | DATA | +5V | GND | MODULAR TOOL #4 | !RST | TMS | GND | RX2 | SCLK | !RST | MOSI | SPI/ISCP | TX2 | MISO | TDI | +5V | 5V I/O | RX3 | GND | TX3 | 3.3V I/O | FAN1 | RXD | http://delta.firepick.org | TXD | FAN2 | P/N: EMC03 Rev A | ENDSTOP | MOT | Z AXIS | I2C | SDA | SCL | ENDSTOP | GND | +5V | GND | +5V | GND | Y AXIS | RX | MOT | +3.3V | AREF | RXD | TX | +24V | TEST POINTS | SDA | SCL | D13 | E-STOP | RESET | VIN | GND | GND | +5V | 3.3V | !RESET | IOREF